# Altium PCB ToolSub.PcbDoc
Units mm, origin at the board's own origin, x right, y up, seen from the top; angles counter-clockwise.
Board outline 50 x 35 mm, 2 copper layers (Top Layer, Bottom Layer); 9 components, 6 nets, 42 pads, 14 vias.
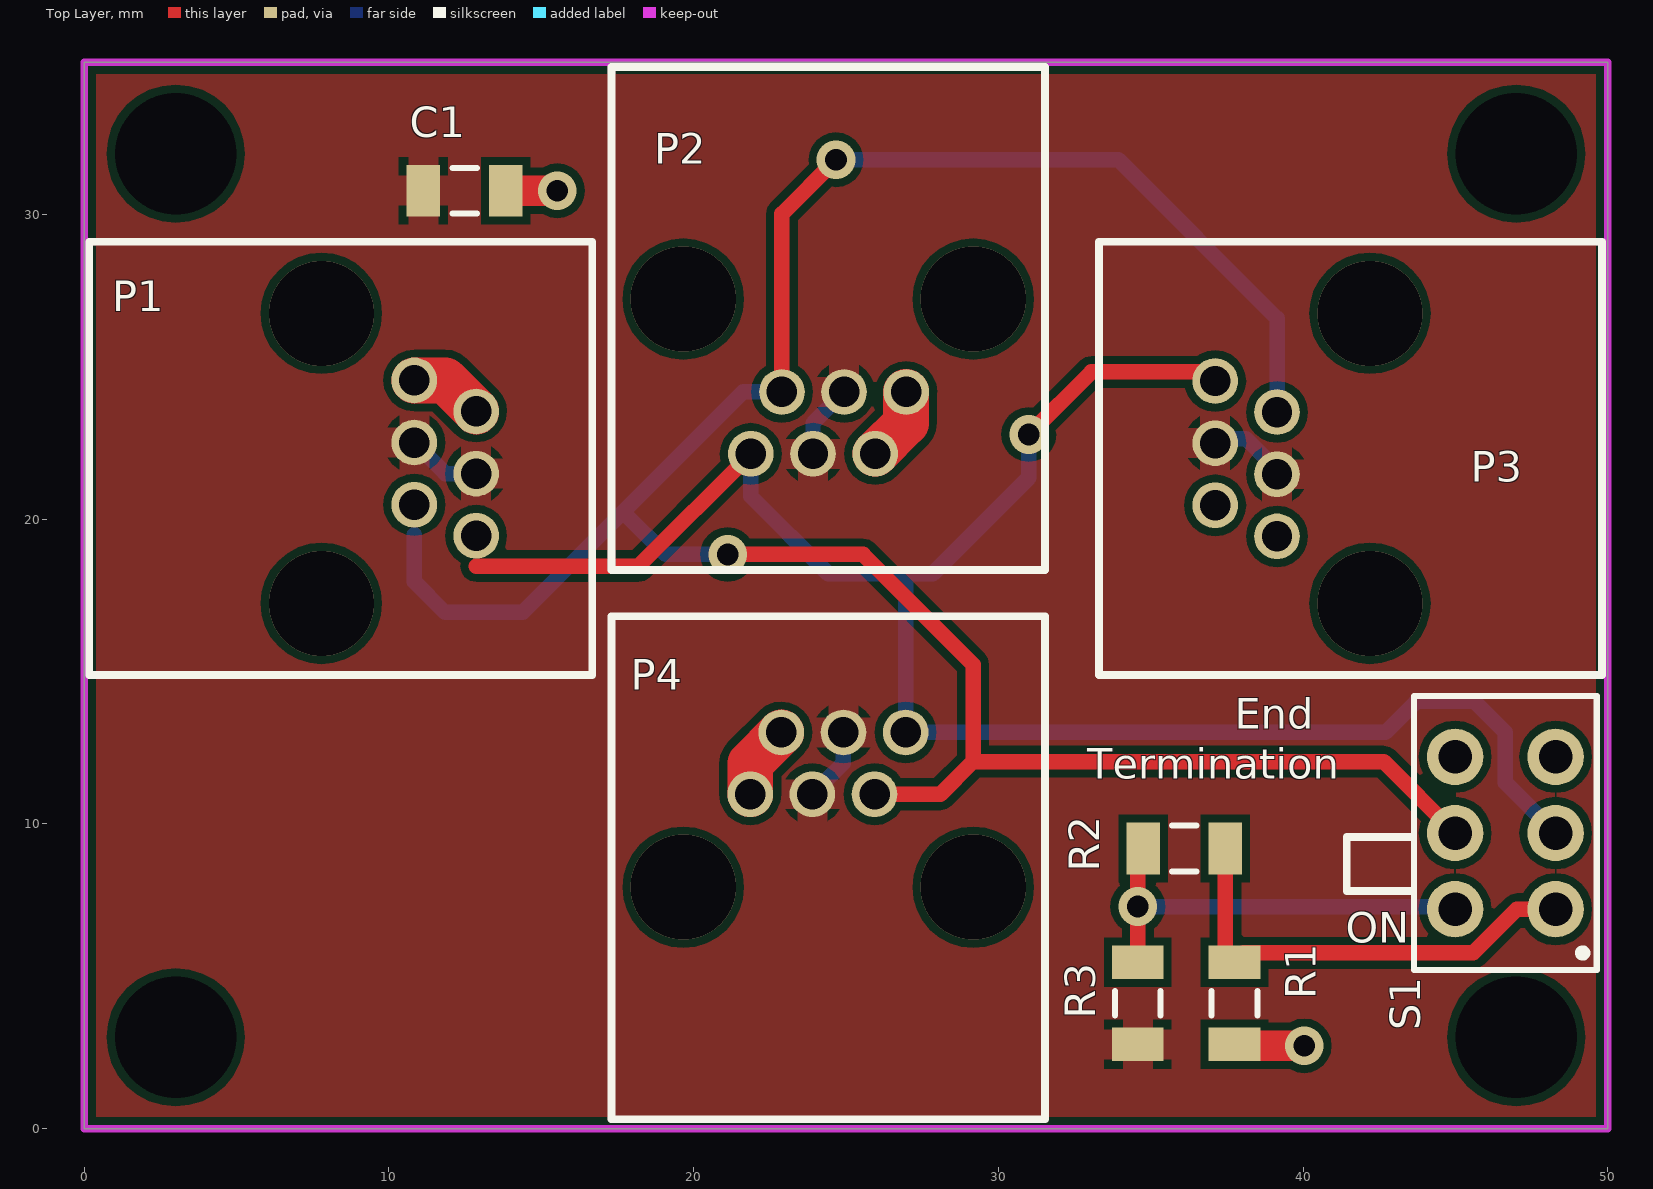
[diagram p0: Top Layer view]
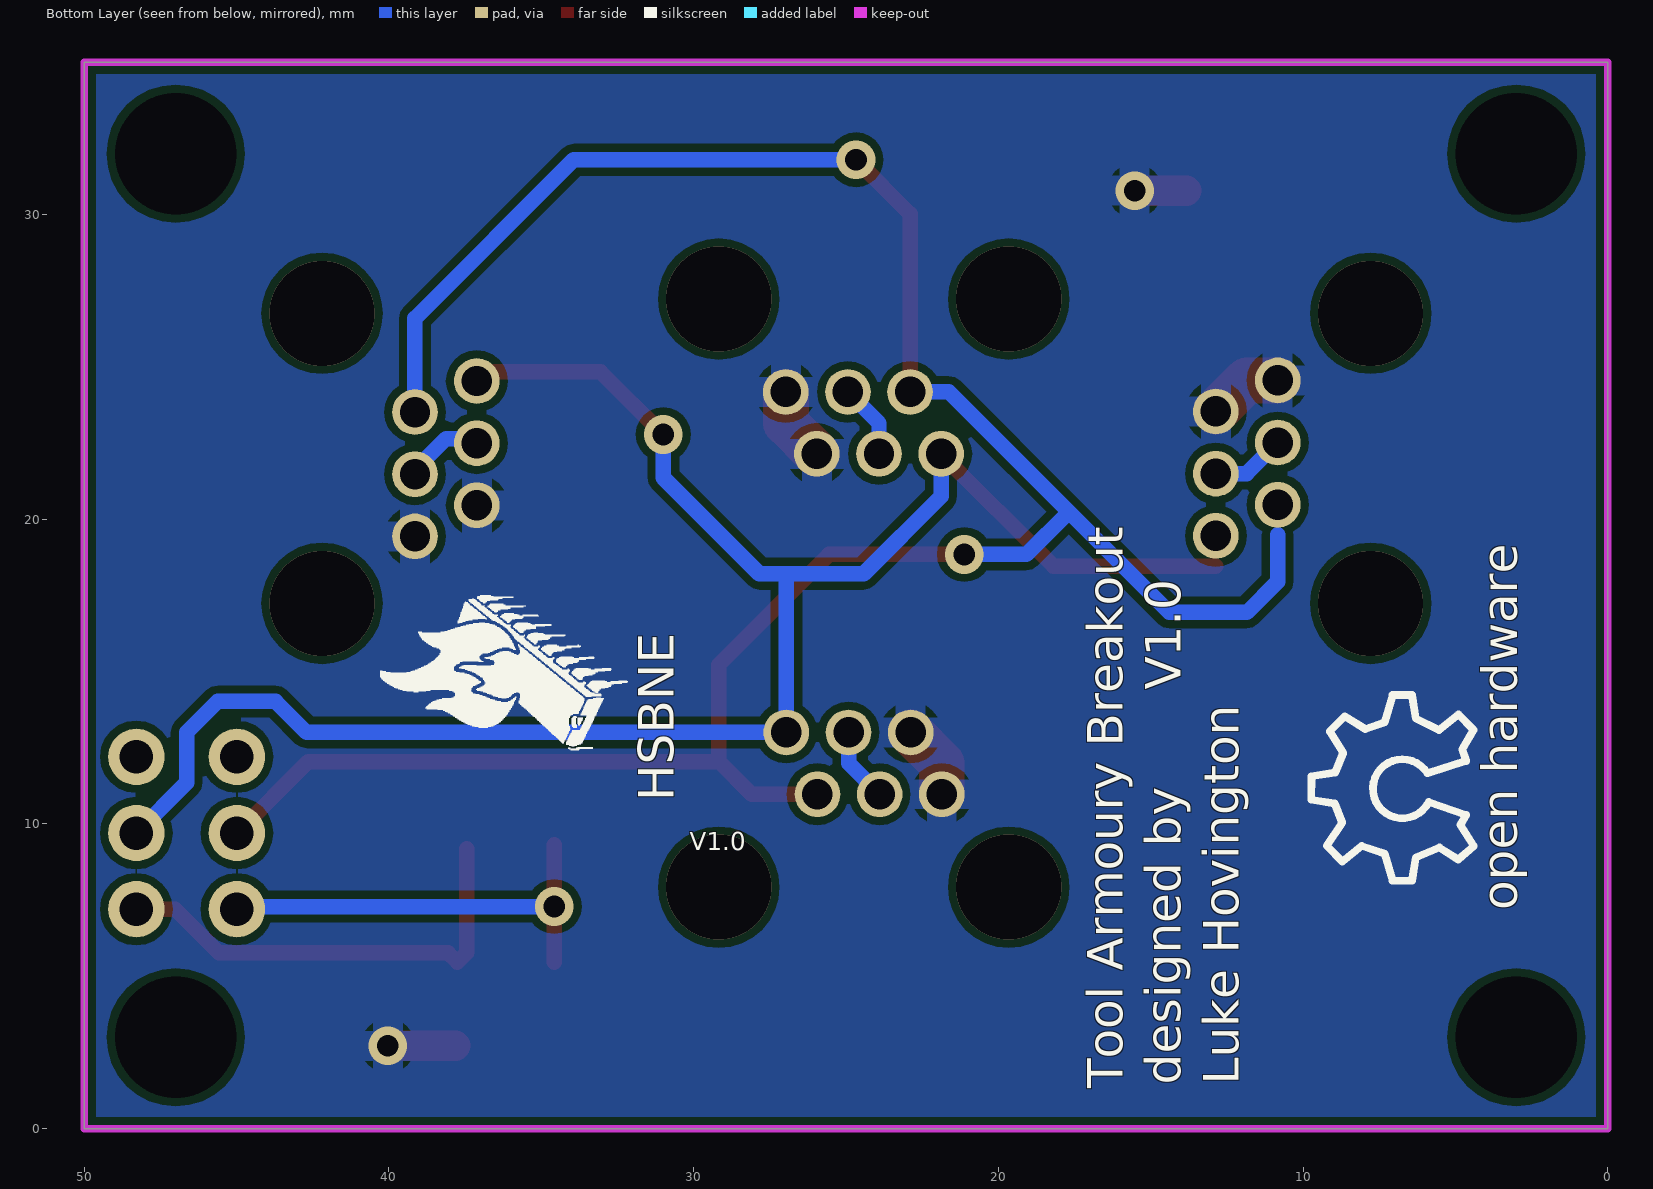
[diagram p1: Bottom Layer view, seen from below]

## Layer stack, top to bottom
Top Layer: signal copper 0.0356
Dielectric: dielectric 0.32, FR-4, Dk 4.8
Bottom Layer: signal copper 0.0356

## Board outline
0,0 50,0 50,35 0,35

## Design rules (kind name [scope] priority, off if disabled: settings)
Clearance [All] p1: gap=0.254
ComponentClearance [All] p1: gap=0.254 collisioncheckmode=3 verticalgap=0.254 showdistances=TRUE
HoleSize [All] p1: absolutevalues=TRUE maxlimit=3.5 minlimit=0.025 maxpercent=80.000 minpercent=20.000
PolygonConnect [All] p1: connectstyle=Relief reliefconductorwidth=1 reliefentries=4 polygonreliefangle="90 Angle" airgapwidth=0.254
RoutingVias [All] p1: holewidth=0.3 width=0.5 viastyle="Through Hole" minholewidth=0.2 minwidth=0.5 maxholewidth=0.711 maxwidth=1.27
SilkToSolderMaskClearance [IsPad] p1 off: minsilkscreentomaskgap=0.254 clearancetoexposedcopper=TRUE
SolderMaskExpansion [All] p1: expansion=0.102
Width [All] p1: maxlimit=1.5 minlimit=0.254 preferedwidth=0.508 minimp=50.000000 maximp=50.000000 favimp=50.000000
25 further rules are at their usual default settings.

## Components (designator, comment, footprint, x,y, rotation, side; value= is the part's Value field where it differs from the comment)
C1 "100pF" C1206 12.479,30.786 r0 top
P1 "RJE01-660-01" RJ11 10.32,22 r270 top
P2 "RJE01-660-01" RJ11 24.417,24.69 r180 top
P3 "RJE01-660-01" RJ11 39.657,22 r90 top
P4 "RJE01-660-01" RJ11 24.417,10.466 r0 top
R1 "390R" C1206 37.752,4.116 r270 top
R2 "220R" C1206 36.101,9.196 r0 top
R3 "390R" C1206 34.577,4.116 r90 top
S1 "SW-DPDT" DPDT-6 46.642,9.704 r180 top

## Footprints (in the part's own frame and the unit in brackets; to place one, negate y for a bottom-side part, rotate by r counter-clockwise, add the part's x,y. Pads: shape width x height; smd on the part's side, far side on the other; paste and mask are expansions set on the pad)
C1206 [mm] "Chip Capacitor, Body 3.2x1.6mm, IPC High Density"
  rect 1.1x1.7 smd: 1(-1.35,0) 2(1.35,0)
  silkscreen extent -0.4,-0.75 0.4,0.75, body extent -1.7,-0.9 1.7,0.9, height 1.3
DPDT-6 [mm] "Switch; 6 Leads"
  round 1.85 hole 1.1: 1(-1.65,2.5) 2(-1.65,0) 3(-1.65,-2.5) 4(1.65,-2.5) 5(1.65,0) 6(1.65,2.5)
  silkscreen extent -3,-4.5 3,4.5
RJ11 [mm]
  round 1.5 hole 1: 1(2.54,2.54) 2(1.52,0.51) 3(0.5,2.54) 4(-0.52,0.51) 5(-1.54,2.54) 6(-2.56,0.51)
  silkscreen extent -7.11,-10.16 7.11,6.35

## Part data
C1: library part "Cap 100pF", "Capacitor (Semiconductor SIM Model)"
P1 P2 P3 P4: library part RJ11, "RJ11"
R1 R3: library part Resistor-390R, "Resistor"
R2: library part Resistor-220R, "Resistor"
S1: "Double-Pole, Double-Throw Switch"

## Free pads (board coordinates)
  round 1.524 hole 4 unplated: ""(3,3) ""(3,32) ""(47,3) ""(47,32)

## Via types
v1: diameter 3.45, hole 3.45, Top Layer to Bottom Layer, tented both sides, 8 vias
v2: diameter 1.27, hole 0.711, Top Layer to Bottom Layer, tented both sides, 6 vias

## Nets (pads, with @x,y where several pads share a name; then routed paths per layer and width w, separated by ;. In a path a pad name is that pad's centre, name@x,y a point inside that pad or via, vN(x,y) a via of type N, cw(c..) or ccw(c..) an arc to the next point about the centre after c; other vN are vias at no path point)
12V: C1.2 P1.5 P1.6 P2.5 P2.6 P3.5 P3.6 P4.5 P4.6 R1.2 | length 11.3
  Top Layer w1: C1.2 v2(15.527,30.786) ; R1.2@37.832,2.719 v2(40.038,2.719)
  Top Layer w1.5: P1.6 11.84,24.56 P1.5 ; P4.6 21.857,11.986 P4.5 ; P2.5 26.969,23.162 P2.6@26.969,24.18
GND: C1.1 P1.3 P1.4 P2.3 P2.4 P3.3 P3.4 P4.3 P4.4 R3.1 | length 9.8
  Bottom Layer w0.508: P1.4 11.85,21.5 P1.3 ; P4.4 24.917,11.996 P4.3 ; P2.3 23.917,23.16 P2.4 ; P3.3@37.117,22.65 38.127,22.65 P3.4@39.147,21.63
NetR1_1: R1.1 R2.2 S1.1 | length 15.1
  Top Layer w0.508: R2.2 37.451,5.767 R1.1 38.057,5.771 45.586,5.771 47.019,7.204 S1.1
NetR2_1: R2.1 R3.2 S1.6 | length 14.3
  Top Layer w0.508: R3.2 v2(34.577,7.291) R2.1@34.577,9.323
  Bottom Layer w0.508: v2(34.577,7.291) 44.905,7.291 S1.6
RS485_A: P1.1 P2.1 P3.1 P4.1 S1.2 | length 61.7
  Top Layer w0.508: 12.86,18.467 18.194,18.467 P2.1 ; v2(30.997,22.785) 33.053,24.841 36.585,24.841 P3.1@37.117,24.309
  Bottom Layer w0.508: P2.1 21.877,20.753 24.417,18.213 26.957,18.213 ; v2(30.997,22.785) 30.997,21.364 27.846,18.213 26.957,18.213 ; S1.2 46.642,11.354 46.642,13.006 45.626,14.022 43.721,14.022 42.705,13.006 P4.1 26.957,18.213
RS485_B: P1.2 P2.2 P3.2 P4.2 S1.5 | length 82.1
  Top Layer w0.508: v2(21.115,18.848) 25.56,18.848 29.173,15.235 29.173,12.047 ; P2.2 22.897,30.028 v2(24.671,31.802) ; P4.2 28.102,10.976 29.173,12.047 ; S1.5 42.649,12.047 29.173,12.047
  Bottom Layer w0.508: 10.83,19.487 10.83,17.957 11.844,16.943 14.384,16.943 17.686,20.245 ; v2(21.115,18.848) 19.083,18.848 17.686,20.245 ; P2.2 21.621,24.18 17.686,20.245 ; v2(24.671,31.802) 33.942,31.802 39.147,26.597 P3.2@39.147,23.67
pads on no net: S1.3 S1.4
copper on no net:
  other v1: 19.657,7.926 29.177,7.926 7.78,17.24 42.197,17.24 7.78,26.76 42.197,26.76 19.657,27.23 29.177,27.23

## Polygon pours and split planes (outlines as drawn)
GND on Top Layer "Top Layer-No Net" (solid, pour order 2): 0,0 50,0 50,35 0,35
12V on Bottom Layer "Top Layer-No Net" (solid, remove dead copper, pour order 3): 0,0 50,0 50,35 0,35

## Keep-outs
Keep-Out Layer:
  the board outline again, w0.254

## Silkscreen, mask and mechanical layers (free items; w line width, h text height)
Top Overlay:
  lines w0.254: 43.594,7.799 41.435,7.799 41.435,9.577 43.594,9.577
  text "End" at 37.752,13.133 h1
  text "Termination" at 32.926,11.482 h1
  text "ON" at 41.402,6.096 h1
Bottom Overlay:
  drawing of 1356 lines, arcs and shapes, not listed
  text "V1.0" at 13.622,14.403 h2 r270
  text "HSBNE" at 30.259,10.745 h2 r270
  text "V1.0" at 30.132,8.942 h1
  text "open hardware" at 2.573,7.164 h2 r270
  text "Luke Hovington" at 11.717,1.449 h2 r270
  text "designed by" at 13.622,1.449 h2 r270
  text "Tool Armoury Breakout" at 15.527,1.322 h2 r270